# Altium PCB bs.PcbDoc (part 1 of 2)
Units mm, origin at the board's own origin, x right, y up, seen from the top; angles counter-clockwise.
Board outline 26 x 26 mm, 4 copper layers (Top Layer, Int1 (GND), Int2 (PWR), Bottom Layer), stack 0.801 mm thick; 54 components, 41 nets, 239 pads, 117 vias.
Unrouted connection lines stored in the file: 12.
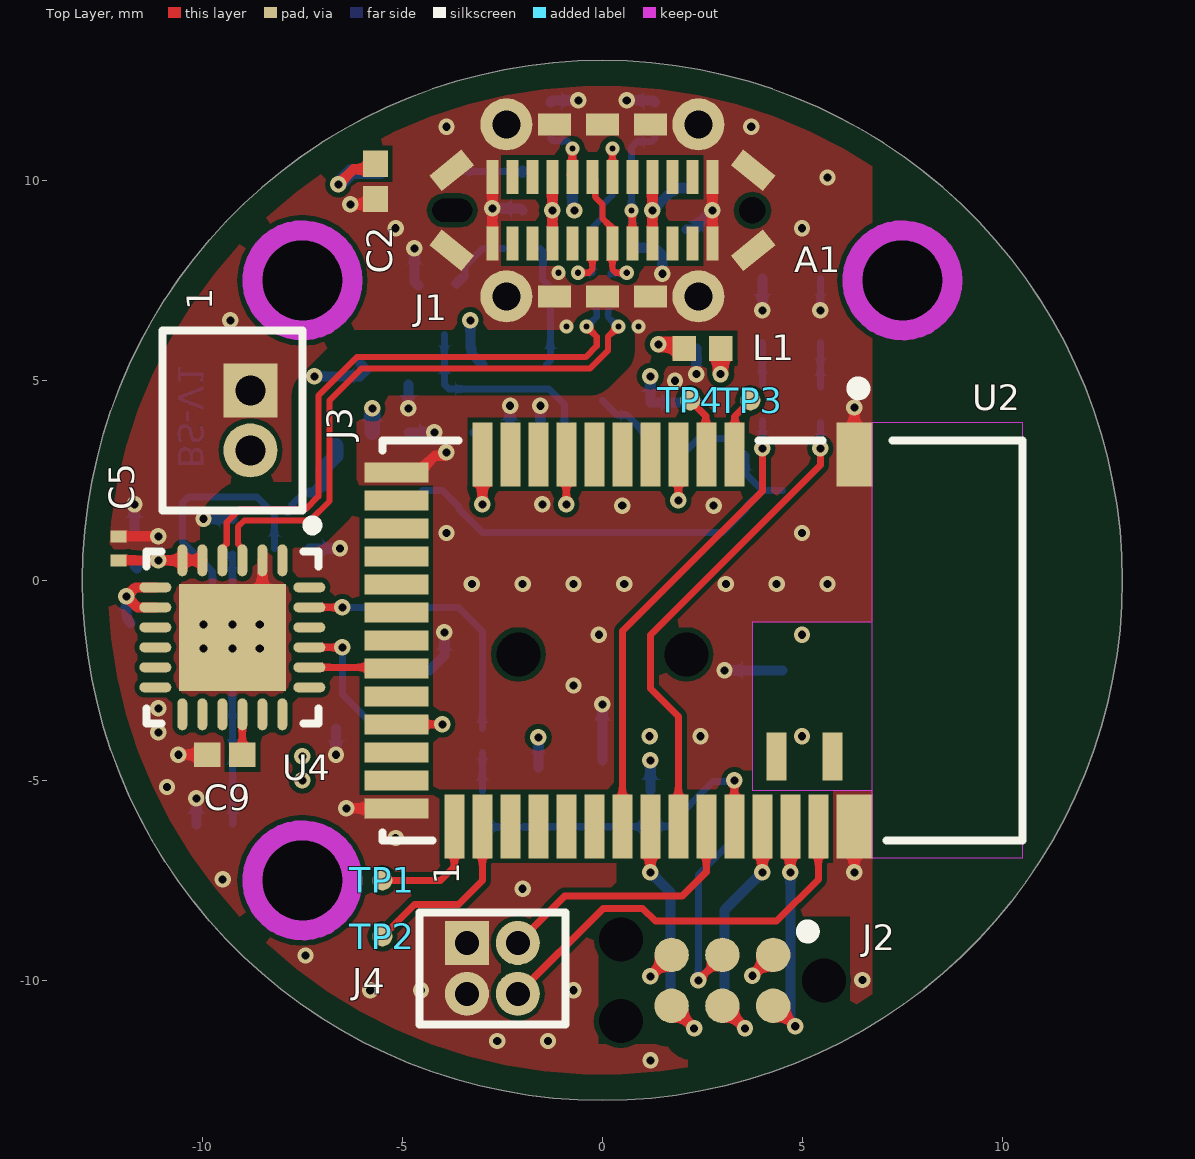
[diagram p0: Top Layer view]
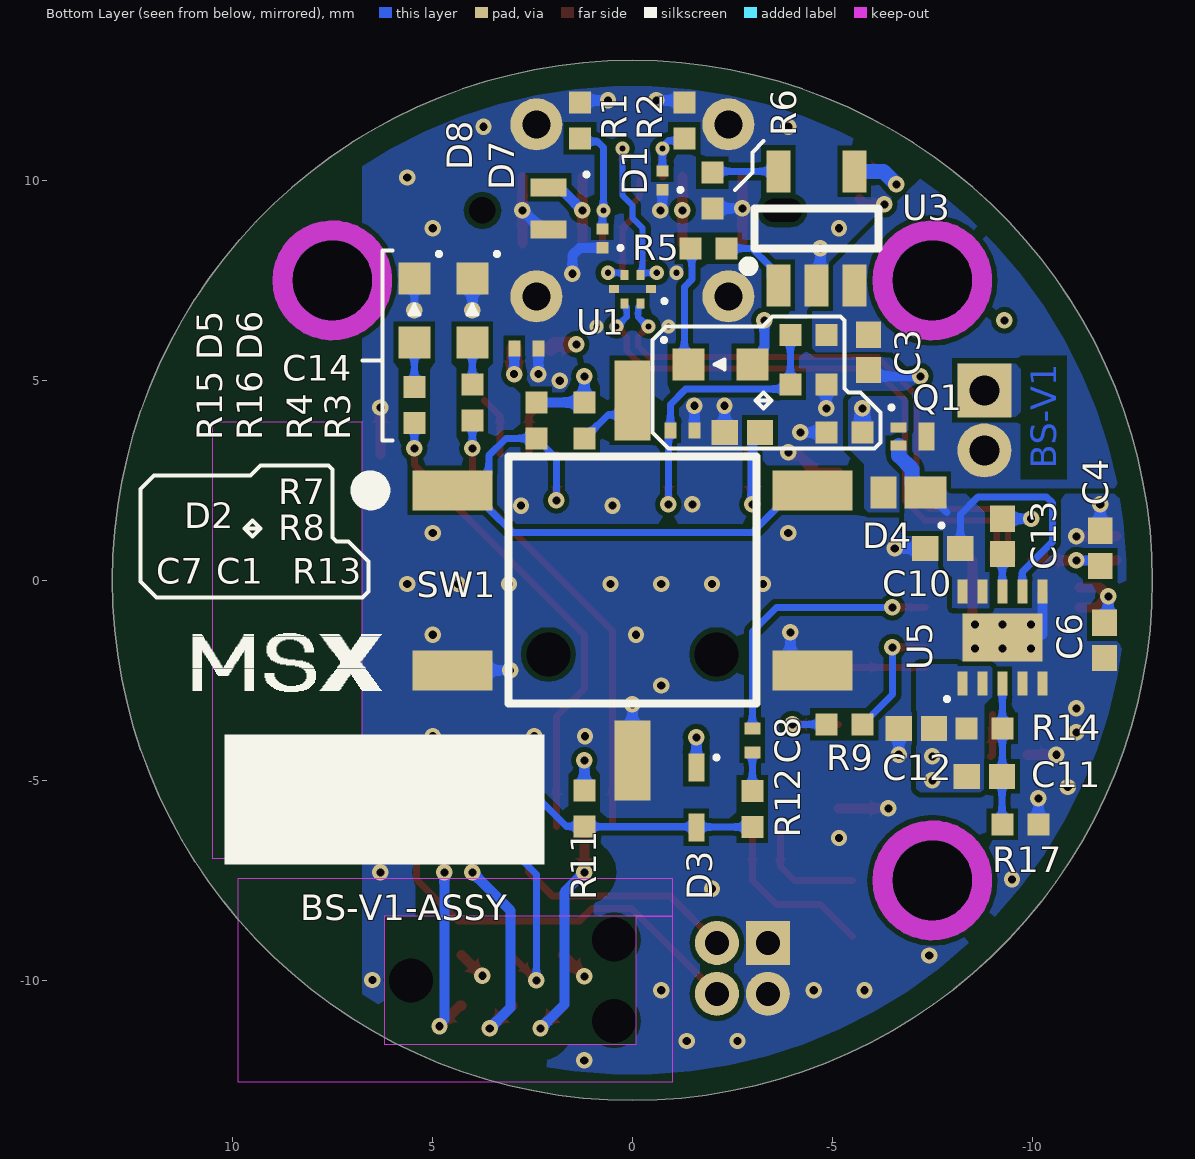
[diagram p1: Bottom Layer view, seen from below]
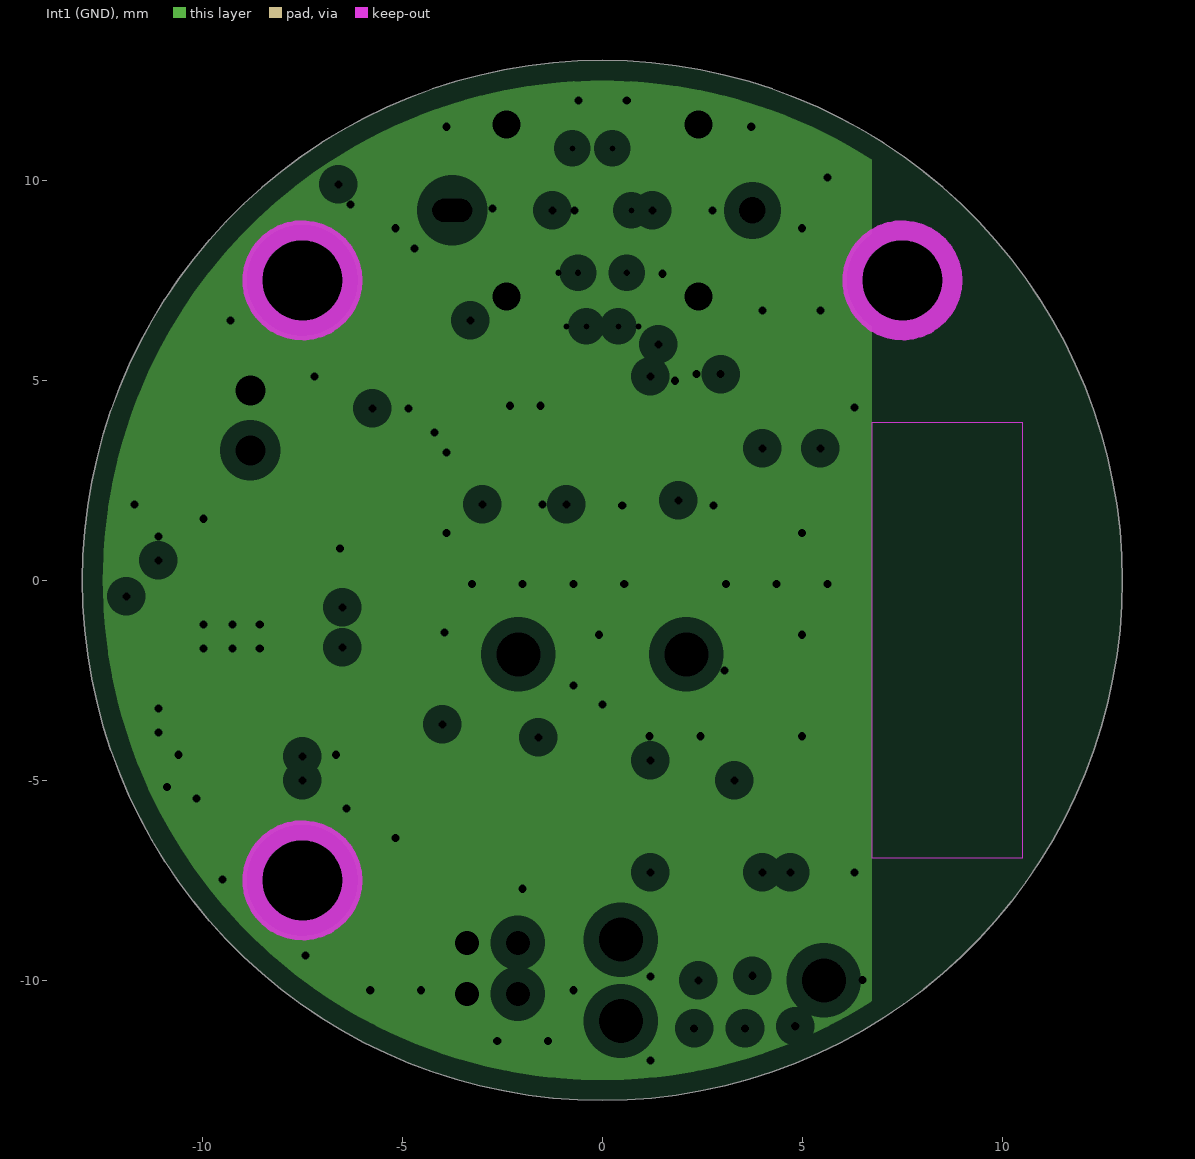
[diagram p2: Int1 (GND), clearances drawn from the general rule]
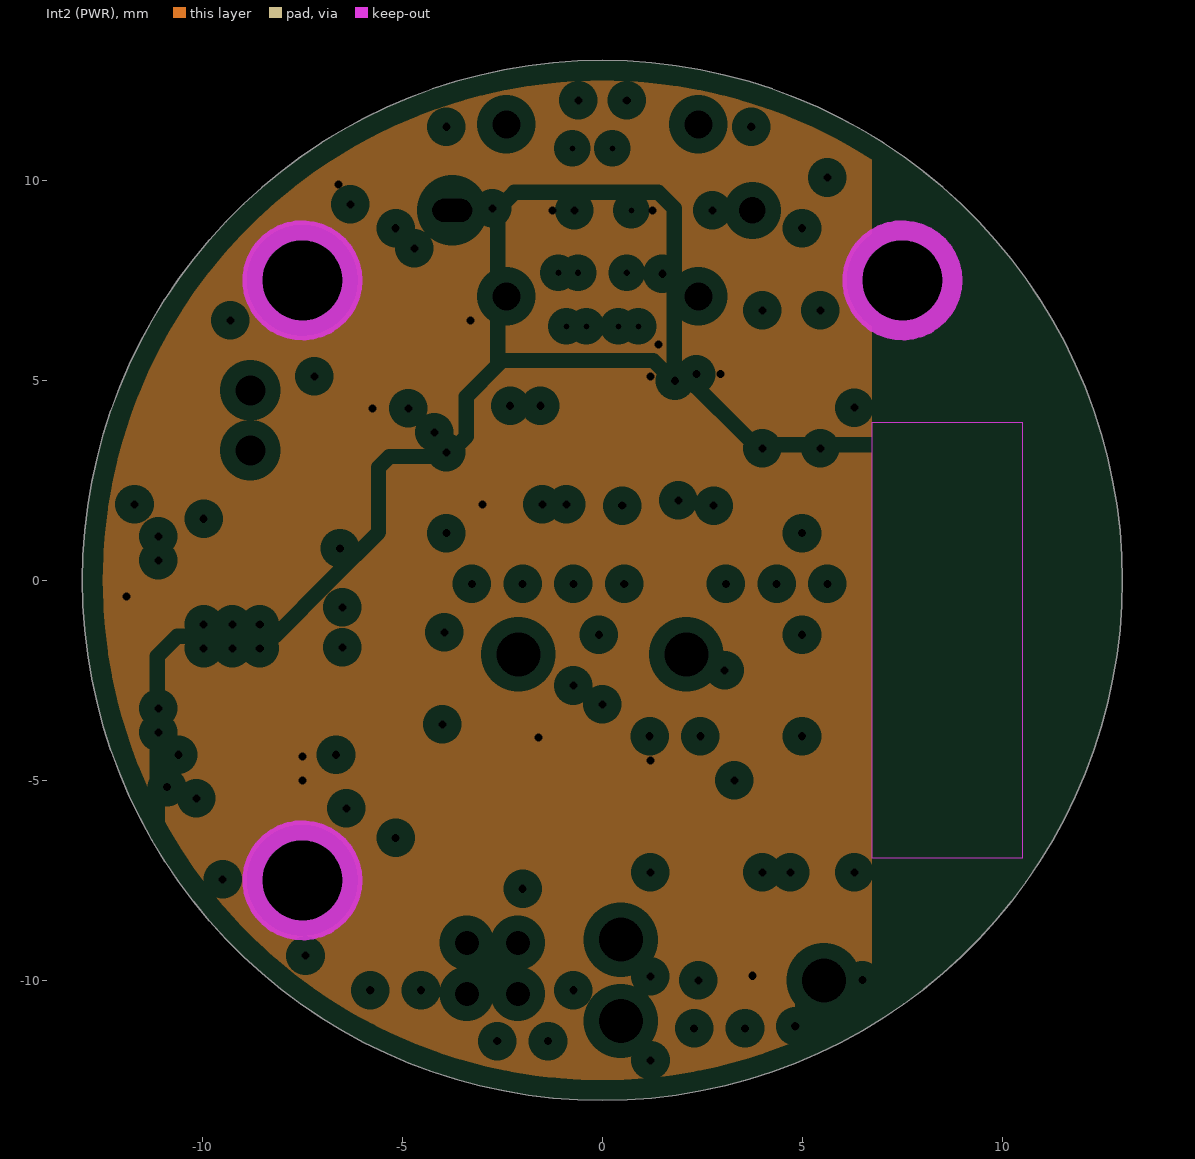
[diagram p3: Int2 (PWR), clearances drawn from the general rule]
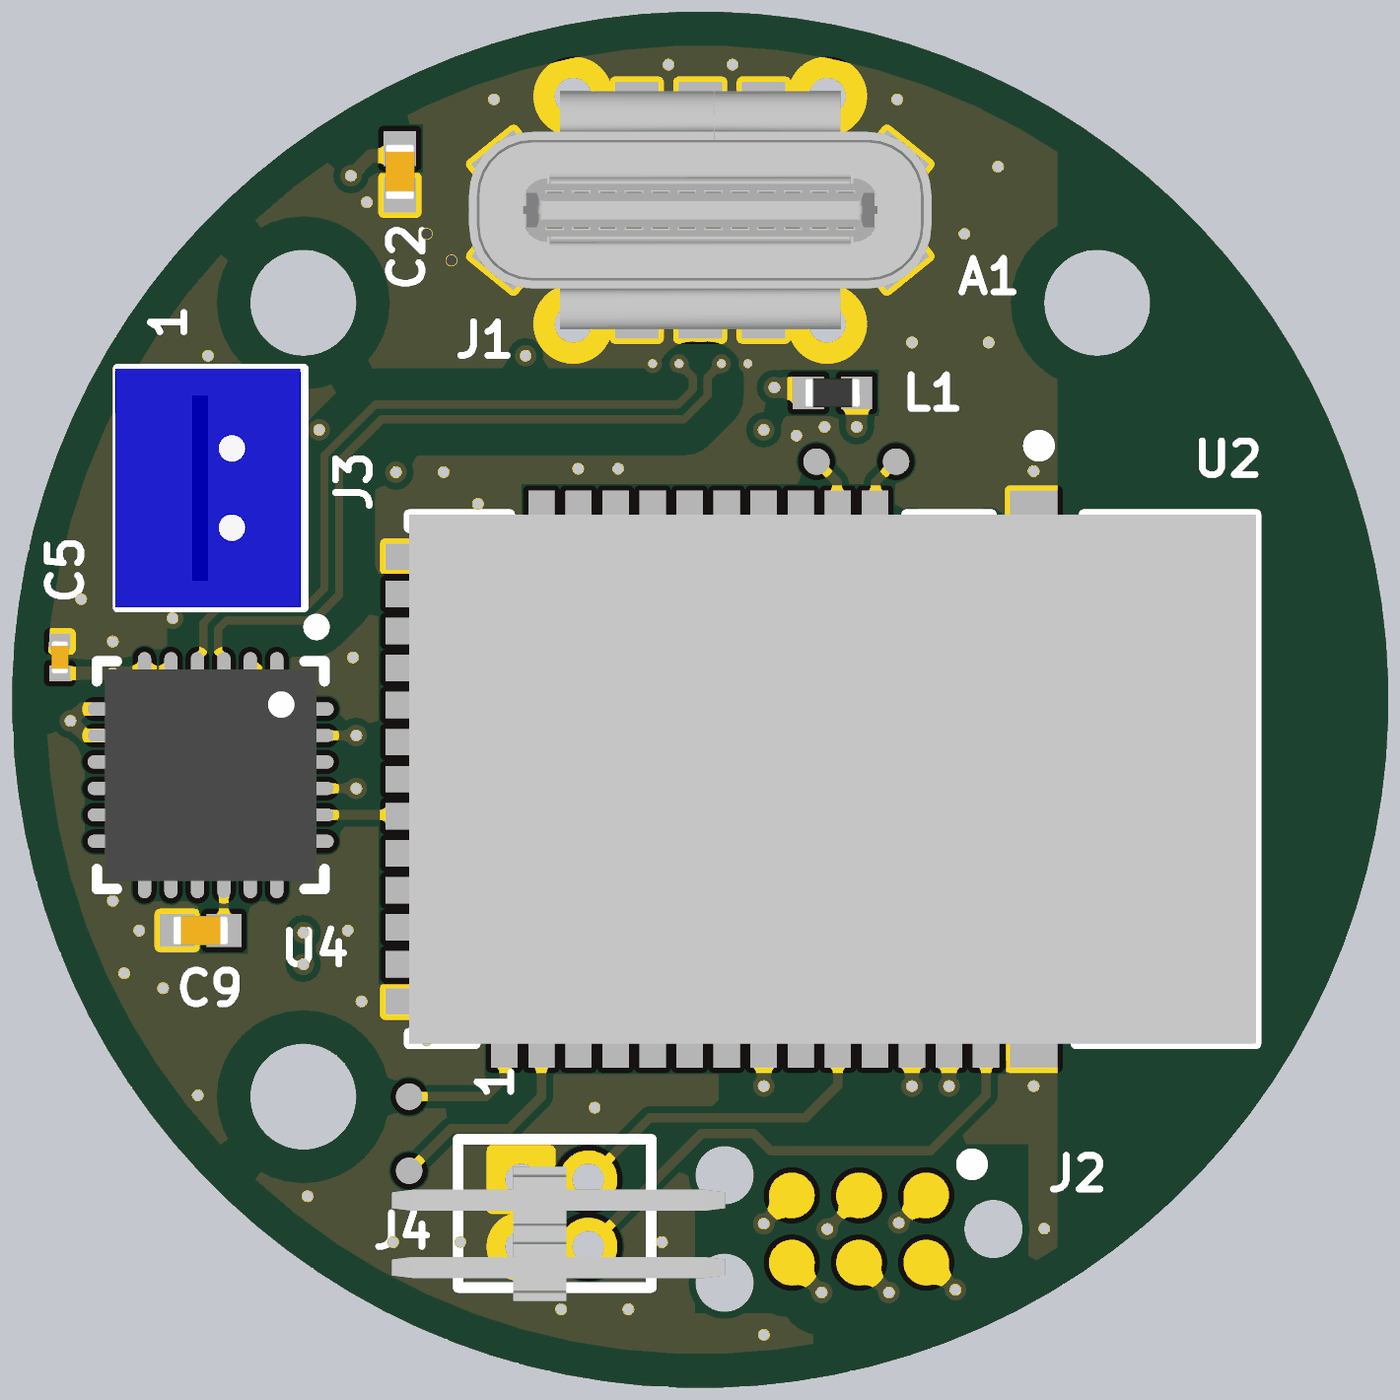
[diagram p4: 3D render of the assembled board from above, using the file's embedded part models]
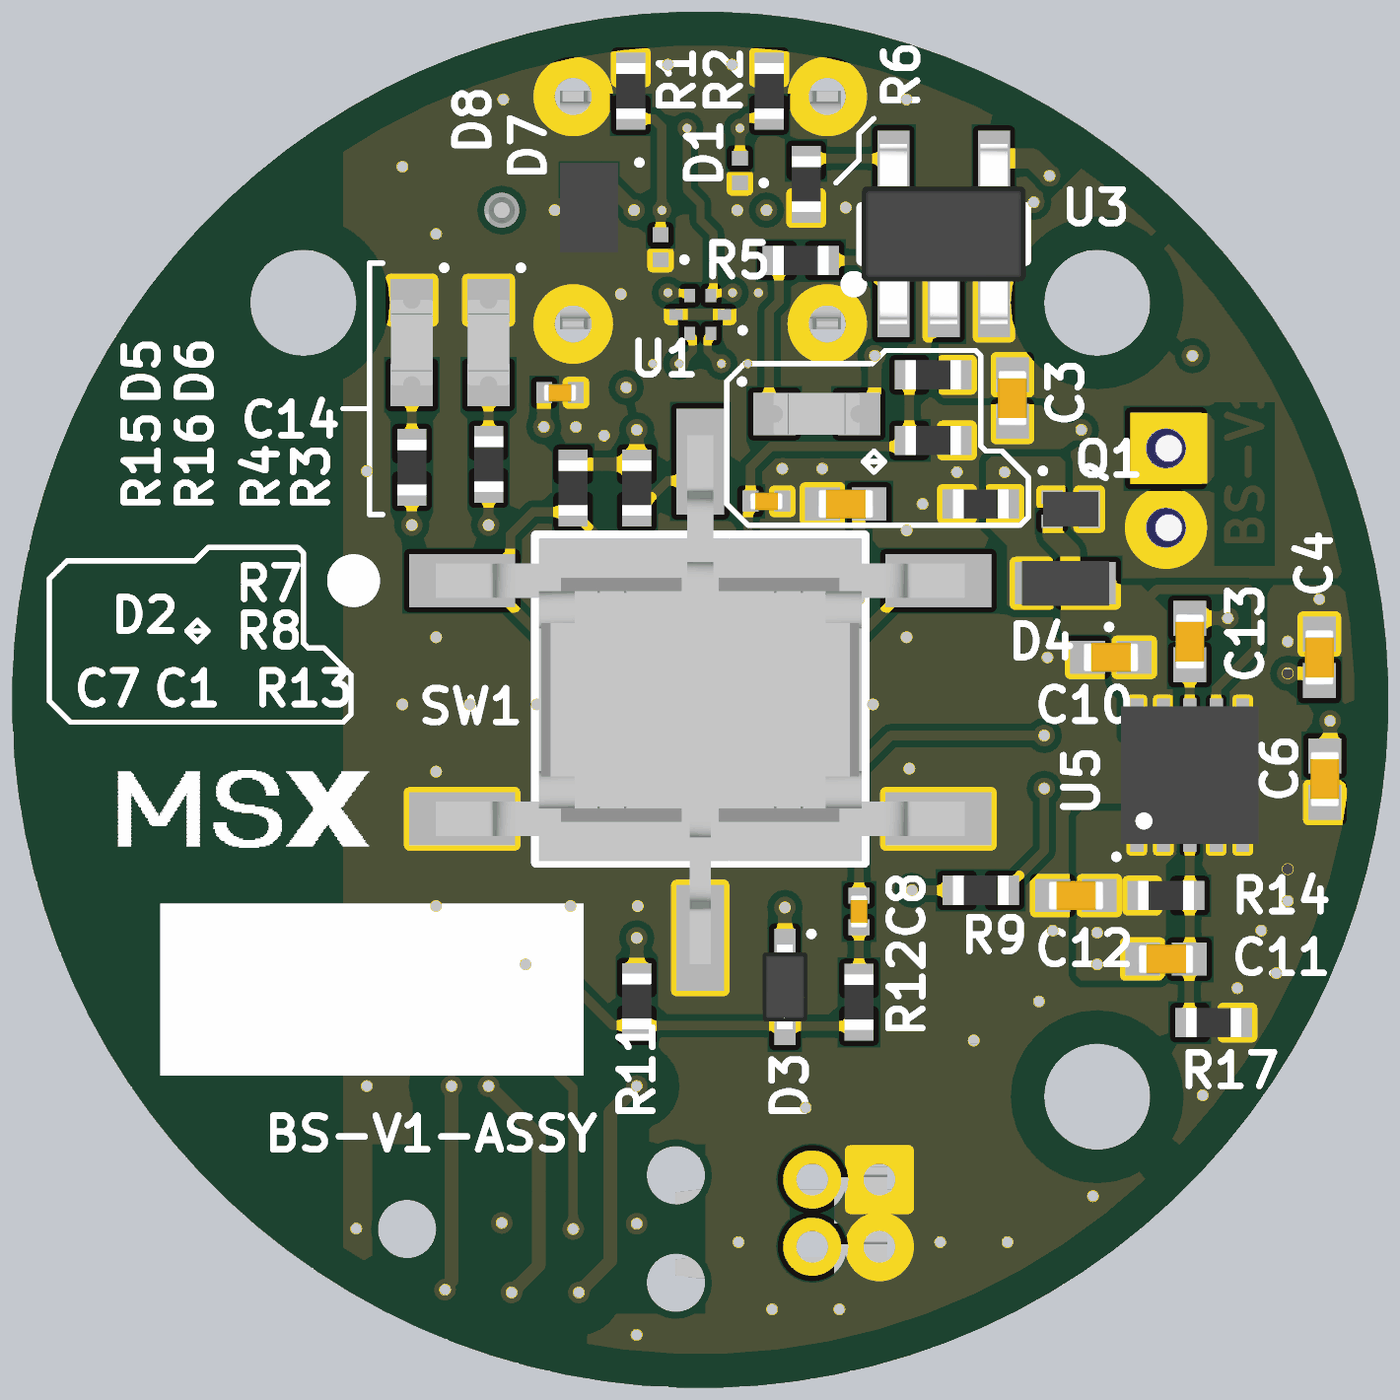
[diagram p5: 3D render of the assembled board from below, using the file's embedded part models]

## Layer stack, top to bottom
Top Solder: solder mask 0.0254, SM-001, Dk 4
Top Layer: signal copper 0.035
Dielectric 1: prepreg 0.1803, PP-021, Dk 4.7
Int1 (GND): plane copper 0.035, net GND
Dielectric 2: core 0.3, CircuitHub-4L, Dk 4.6
Int2 (PWR): plane copper 0.035, net (Multiple Nets)
Dielectric 3: prepreg 0.1803, PP-021, Dk 4.7
Bottom Layer: signal copper 0.035
Bottom Solder: solder mask 0.0254, SM-001, Dk 4

## Board outline
0,-13 cw(c0,0) -13,0 cw(c0,0) 0,13 cw(c0,0) 13,0 cw(c0,0)

## Design rules (kind name [scope] priority, off if disabled: settings)
AcuteAngle [All] p1: minimum=5.00000000000000E+0001 checktracksonly=FALSE
BoardOutlineClearance [Not OnTopSilkscreen And Not OnBottomSilkscreen And Not IsKeepOut] p1: gap=0.635 ignorepadtopadclearanceinfootprint=FALSE
Clearance "GND Via Exception" [InNetClass('USB') vs IsVia And InNet('GND')] p1: gap=0.127 ignorepadtopadclearanceinfootprint=FALSE
Clearance "GND 3H Exception" [InNet('GND') vs InNetClass('USB') And TouchesRoom('USB-TTL','USB-C Top','Prog Pins','Tag-Connect')] p2: gap=0.127 ignorepadtopadclearanceinfootprint=FALSE
Clearance "Sensitive 3H" [InNetClass('SWD') Or InNetClass('USB') vs Not InNetClass('SWD') And Not InNetClass('USB') And Not InNet('DFU') And Not TouchesRoom('USB-C Top','Tag-Connect','Prog Pins','USB-TTL')] p3: gap=0.6 ignorepadtopadclearanceinfootprint=FALSE
Clearance "Default Clearance" [Not InComponent('J2','U2') vs Not IsKeepOut] p4: gap=0.127 ignorepadtopadclearanceinfootprint=FALSE
ComponentClearance "TP to TP" [InComponentClass('Testpoints') vs InComponentClass('Testpoints')] p1: gap=0.635 collisioncheckmode=3 verticalgap=0 showdistances=FALSE
ComponentClearance "PTH to PTH" [InComponentClass('PTH') And Not InComponentClass('Testpoints') And Not InComponent('J2') vs InComponentClass('PTH') And Not InComponentClass('Testpoints') And Not InComponent('J2')] p2: gap=2.54 collisioncheckmode=3 verticalgap=0 showdistances=FALSE
ComponentClearance "SMT to PTH" [InComponentClass('SMT') And Not InComponent('J2') vs InComponentClass('PTH') And Not InComponentClass('Testpoints')] p3: gap=1.016 collisioncheckmode=3 verticalgap=0 showdistances=FALSE
ComponentClearance "SMT to SMT" [InComponentClass('SMT') vs InComponentClass('SMT')] p4: gap=0.635 collisioncheckmode=3 verticalgap=0 showdistances=FALSE
DiffPairsRouting USB [InDifferentialPairClass('USB')] p1: maxlimit=0.127 minlimit=0.127 mostfreqgap=0.127 toplayer_minwidth=0.152 toplayer_maxwidth=0.152 toplayer_prefwidth=0.152 bottomlayer_minwidth=0.152 bottomlayer_maxwidth=0.152 bottomlayer_prefwidth=0.152 impedanceprofiledriven=TRUE impedanceprofileid={9615F083-B4A8-41AA-9258-6BDF7C8BAEB9} impedanceprofilevalue=90.000000 maxuncoupledlength=0.635
Height "Top Height" [OnTopLayer] p1: minheight=0 maxheight=9 prefheight=8.8
Height "Bottom Height" [OnBottomLayer] p2: minheight=0 maxheight=8 prefheight=7.8
HoleSize "Via Hole Size" [IsVia] p1: absolutevalues=TRUE maxlimit=150 minlimit=0.152 maxpercent=80.000 minpercent=20.000
HoleSize "Default Hole Size" [All] p2: absolutevalues=TRUE maxlimit=150 minlimit=0.254 maxpercent=80.000 minpercent=20.000
HoleToHoleClearance mdViaViaSameLayer [IsVia vs IsVia] p1: gap=0.203 allowstackedmicrovias=TRUE
HoleToHoleClearance [All] p2: gap=0.254 allowstackedmicrovias=TRUE
Length "SWD Max Length" [InNetClass('SWD')] p1: maxlimit=101.6 minlimit=0
MatchedLengths "USB Matching" [InDifferentialPairClass('USB')] p1: tolerance=3.81 checknetsindiffpair=TRUE checkdiffpairvsdiffpair=FALSE checkxsignals=FALSE checkothers=FALSE
MaximumViaCount "USB 2 Vias" [InDifferentialPairClass('USB')] p1: limit=2
MinimumAnnularRing "Via AR" [IsVia] p1: minimumring=0.102
MinimumAnnularRing [All] p2: minimumring=0.127
MinimumSolderMaskSliver [All] p1 off: minsoldermaskwidth=0.001
PermittedLayers "All Allowed" [All] p1: toplayerpermitted=TRUE bottomlayerpermitted=TRUE
PlaneClearance [All] p1: clearance=0.381
PlaneConnect "Direct Plane Connect" [IsVia] p1: planeconnectstyle=Direct reliefexpansion=0.508 reliefentries=4 reliefconductorwidth=0.254 reliefairgap=0.254
PlaneConnect [All] p2: planeconnectstyle=Relief reliefexpansion=0.508 reliefentries=4 reliefconductorwidth=0.254 reliefairgap=0.127
PolygonConnect "Direct Poly Connect" [IsVia Or InComponentClass('Testpoints') Or OnTopLayer Or OnBottomLayer] p1: connectstyle=Direct reliefconductorwidth=0.254 reliefentries=4 polygonreliefangle="90 Angle" airgapwidth=0.254
PolygonConnect [All] p2: connectstyle=Relief reliefconductorwidth=0.254 reliefentries=4 polygonreliefangle="90 Angle" airgapwidth=0.127
RoomDefinition Tag-Connect [False] p1: confinementstyle=ConfineIn formatcopy=TRUE lockcomponents=FALSE outline -0.1,-8.4 6.2,-8.4 6.2,-11.6 -0.1,-11.6
RoomDefinition USB-TTL [False] p2: confinementstyle=ConfineIn formatcopy=TRUE lockcomponents=FALSE outline -10.9,0.912 -7.6,0.912 -7.6,-0.1 -10.9,-0.1
RoomDefinition "Prog Pins" [False] p3: confinementstyle=ConfineIn formatcopy=TRUE lockcomponents=FALSE outline 6,-4.3 -0.004,-4.3 -0.004,-7.7 6,-7.7
RoomDefinition "USB-C Top" [False] p4: confinementstyle=ConfineIn formatcopy=TRUE lockcomponents=FALSE outline -3.1,12.353 3.1,12.353 3.1,6.09 -3.1,6.09
RoutingLayers "Default Layers" [All] p1: top layer_v5=TRUE bottom layer_v5=TRUE
RoutingVias [All] p1: holewidth=0.203 width=0.406 viastyle="Through Hole" minholewidth=0.152 minwidth=0.356 maxholewidth=150 maxwidth=150
SMDEntry [All] p1: side=TRUE corner=TRUE anyangle=TRUE
SilkToSilkClearance [All] p1 off: silktosilkclearance=0.254
SilkToSolderMaskClearance [IsPad] p1 off: minsilkscreentomaskgap=0.127 clearancetoexposedcopper=TRUE
SolderMaskExpansion [All] p1: expansion=0.102 istentingtop=FALSE
UnRoutedNet [All] p1: checkbadconnections=TRUE
ViasUnderSMD [All] p1: allowed=FALSE
Width "Power Width" [InNetClass('Power')] p1: maxlimit=150 minlimit=0.178 preferedwidth=0.254
Width "50Ohm SE Width" [InNetClass('SWD')] p2: maxlimit=0.254 minlimit=0.254 preferedwidth=0.254 impedanceprofiledriven=TRUE impedanceprofileid={A2997885-AED6-4369-A679-767B99147C96} impedanceprofilevalue=50.000000 minimp=50.000000 maximp=50.000000 favimp=50.000000
Width "Default Width" [All] p3: maxlimit=150 minlimit=0.127 preferedwidth=0.178
18 further rules are at their usual default settings.

## Classes and differential pairs
component class SMT: C1 C2 C3 C4 C5 C6 C7 C8 C9 C10 C11 C12 C13 C14 D1 D2 D3 D4 D5 D6 D7 D8 J2 L1 Q1 R1 R2 R3 R4 R5 R6 R7 R8 R9 R11 R12 R13 R14 R15 R16 R17 SW1 U1 U2 U3 U4 U5
component class PTH: J1 J3 J4
component class "Sensitive Exception": J1 J2 U1 U2 U4
component class Testpoints: TP1 TP2 TP3 TP4
net class Power: 3V3 GND VBAT VBUS VBUS_IN VIN_LDO
differential pair class USB: USB USB_IN
net class USB: USB_IN_N USB_IN_P USB_N USB_P
net class SWD: SWCLK SWDIO SWO
differential pair USB: +USB_P -USB_N
differential pair USB_IN: +USB_IN_P -USB_IN_N

## Components (designator, comment, footprint, x,y, rotation, side; value= is the part's Value field where it differs from the comment)
C1 "10uF" C0402 -2.75,3.7 r180 bottom locked
C2 "4.7uF" C0402 -5.675,9.975 r90 top locked
C3 "4.7uF" C0402 -5.9,5.7 r90 bottom locked
C4 "1uF" C0402 -11.698,0.8 r270 bottom locked
C5 "0.1uF" C0201 -12.1,0.801 r270 top locked
C6 "1uF" C0402 -11.8,-1.5 r90 bottom locked
C7 "0.1uF" C0201 -1.25,3.75 r0 bottom locked
C8 "0.1uF" C0201 -3,-4 r90 bottom locked
C9 "4.7uF" C0402 -9.44,-4.36 r0 top locked
C10 "10uF" C0402 -7.76,0.8 r180 bottom locked
C11 "10000pF" C0402 -8.8,-4.9 r0 bottom locked
C12 "10uF" C0402 -7.1,-3.7 r180 bottom locked
C13 "0.015uF" C0402 -9.25,1.1 r270 bottom
C14 "0.1uF" C0201 2.65,5.8 r0 bottom locked
D1 "ESDAXLC6-1BU2" ONS_0201 -0.75,10 r0 bottom locked
D2 "5988070107F" LED0603 -2.2,5.4 r180 bottom locked
D3 "1N4148X-TP" MCC_SOD523 -1.6,-5.425 r270 bottom locked
D4 "PMEG2020EPK" NXP_DFN1608D-2 -6.9,2.2 r0 bottom locked
D5 "5988091107F" LED0603 5.45,6.75 r270 bottom locked
D6 "5988070107F" LED0603 4,6.75 r270 bottom locked
D7 "ESDAXLC6-1BU2" ONS_0201 0.75,8.55 r0 bottom locked
D8 "ESDA7P60-1U1M" STM_1610 2.1,9.3 r270 bottom locked
J1 "10132328-10011LF" AMP_USBC_VT 0,9.25 r180 top locked
J2 "TC2030-IDC-NL" TAG_6P 3,-10 r180 top locked
J3 "B2B-ZR(LF)(SN)" JST_ZH_2P_PTH_VT -8.8,4 r270 top locked
J4 "GRPB022VWVN-RC" HDR10_2X2_0.05IN -2.75,-9.7 r270 top locked
L1 "BLM15PX601SN1D" L0402 2.5,5.8 r0 top locked
Q1 "DMP21D0UFB4-7B" DIO_X2-DFN1006-3 -7,3.6 r180 bottom locked
R1 "5.1k" R0402 1.31,11.5 r270 bottom locked
R2 "5.1k" R0402 -1.3,11.5 r270 bottom locked
R3 "47R" R0402 1.2,4 r90 bottom locked
R4 "10k" R0402 2.4,4 r90 bottom locked
R5 "1k" R0402 -1.9,8.3 r180 bottom locked
R6 "2k" R0402 -2,9.741 r90 bottom locked
R7 "806k" R0402 -4.4,6.14 r180 bottom locked
R8 "2M" R0402 -4.4,4.9 r0 bottom locked
R9 "1k" R0402 -5.3,-3.6 r180 bottom locked
R11 "10k" R0402 1.2,-5.7 r90 bottom locked
R12 "0R" R0402 -3,-5.715 r270 bottom locked
R13 "100k" R0402 -5.3,3.7 r180 bottom locked
R14 "3.57k" R0402 -8.8,-3.7 r0 bottom locked
R15 "47R" R0402 5.45,4.39 r270 bottom locked
R16 "1k" R0402 4,4.45 r270 bottom locked
R17 "1.15k" R0402 -9.7,-6.1 r0 bottom locked
SW1 "FSMIJM61AB04" TE_FSMIJM61AB04 0,0 r180 bottom locked
TP1 "TP SMT 0.5MM" TP_SMT_0.5MM -5.5,-7.5 r180 top locked
TP2 "TP SMT 0.5MM" TP_SMT_0.5MM -5.5,-8.9 r180 top locked
TP3 "TP SMT 0.5MM" TP_SMT_0.5MM 3.7,4.5 r90 top locked
TP4 "TP SMT 0.5MM" TP_SMT_0.5MM 2.197,4.5 r90 top locked
U1 "EXC-14CS350H" PAN_EXC14CS 0,7.28 r0 bottom locked
U2 "MDBT42Q" RAY_MDBT42Q 2.5,-1.5 r270 top locked
U3 "MCP73831T-2ATI/OT" MCP_SOT23-5 -4.6,8.8 r90 bottom locked
U4 "CP2104-F03-GMR" SIL_QFN-24 -9.25,-1.425 r270 top locked
U5 "TPS7A9001DSKR" TI_DSK -9.25,-1.425 r90 bottom locked

## Footprints (in the part's own frame and the unit in brackets; to place one, negate y for a bottom-side part, rotate by r counter-clockwise, add the part's x,y. Pads: shape width x height; smd on the part's side, far side on the other; paste and mask are expansions set on the pad)
AMP_USBC_VT [mm] "USB-C Connector, Through Hole  Vertical"
  round 0 hole 0.66 unplated: 0(-3.75,0)
  round 0 hole 0.58 slot 1 at 0 deg unplated: 0(3.75,0)
  rect 0.3x0.85 smd: A1(-2.75,0.83) A2(-2.25,0.83) A3(-1.75,0.83) A4(-1.25,0.83) A5(-0.75,0.83) A6(-0.25,0.83) A7(0.25,0.83) A8(0.75,0.83) A9(1.25,0.83) A10(1.75,0.83) A11(2.25,0.83) A12(2.75,0.83) B1(2.75,-0.83) B2(2.25,-0.83) B3(1.75,-0.83) B4(1.25,-0.83) B5(0.75,-0.83) B6(0.25,-0.83) B7(-0.25,-0.83) B8(-0.75,-0.83) B9(-1.25,-0.83) B10(-1.75,-0.83) B11(-2.25,-0.83) B12(-2.75,-0.83)
  rect 1.03x0.5 smd rot 39: SHA1(-3.77,1) SHB1(3.77,-1)
  round 1.3 hole 0.7: SHA2(-2.4,2.15) SHA6(2.4,2.15) SHB2(2.4,-2.15) SHB6(-2.4,-2.15)
  rect 0.82x0.55 smd: SHA3(-1.2,2.15) SHA4(0,2.15) SHA5(1.2,2.15) SHB3(1.2,-2.15) SHB4(0,-2.15) SHB5(-1.2,-2.15)
  rect 1.03x0.5 smd rot 141: SHA7(3.77,1) SHB7(-3.77,-1)
  body extent -4.37,-2.25 4.37,2.25, height 8.8
C0201 [mm] "Chip Capacitor, 2-Leads, Body 0.60x0.30mm, IPC Medium Density"
  rect 0.3x0.4 smd: 1(-0.3,0) 2(0.3,0)
  body extent -0.32,-0.17 0.32,0.17, height 0.33
C0402 [mm] "Chip Capacitor, 2-Leads, Body 1.00x0.50mm, IPC Medium Density"
  rect 0.66x0.62 smd: 1(-0.44,0) 2(0.44,0)
  body extent -0.53,-0.28 0.53,0.28, height 0.55
DIO_X2-DFN1006-3 [mm] "DFN, 3-Leads, Body 0.60x1.00mm, Pitch 0.65mm, IPC Medium Density"
  rect 0.4x0.25 smd: 1(-0.35,0.225) 2(-0.35,-0.225)
  rect 0.4x0.7 smd: 3(0.35,0)
  silkscreen extent -0.58,0.68 -0.48,0.77, body extent -0.53,-0.33 0.53,0.32, height 0.4
HDR10_2X2_0.05IN [mm] "4-Pin 2x2 0.05in PTH Header"
  rect 1.1x1.1 hole 0.6: 1(-0.635,-0.635)
  round 1.1 hole 0.6: 2(-0.635,0.635) 3(0.635,-0.635) 4(0.635,0.635)
  silkscreen extent -1.4,-1.83 1.41,1.83, body extent -1.27,-1.7 1.27,1.7, height 4.05
JST_ZH_2P_PTH_VT [mm] "JST ZH Series 1.5mm 2 Position Through Hole, Vertical"
  rect 1.35x1.35 hole 0.75: 1(-0.75,0)
  round 1.35 hole 0.75: 2(0.75,0)
  silkscreen extent -2.25,-2.2 2.25,1.3, body extent -3.75,-2.25 2.25,1.25, height 4.5
L0402 [mm] "Chip Inductor, 2-Leads, Body 1.00x0.50mm, IPC Medium Density"
  rect 0.59x0.62 smd: 1(-0.455,0) 2(0.455,0)
  body extent -0.53,-0.28 0.53,0.28, height 0.55
LED0603 [mm] "Chip Diode, 2-Leads, Body 1.60x0.80mm, IPC Medium Density"
  rect 0.8x0.8 smd: 1(-0.8,0) 2(0.8,0)
  silkscreen extent -1.46,-0.13 0.1,0.66, body extent -0.81,-0.39 0.81,0.39, height 0.71
MCC_SOD523 [mm] "SODFL, 2-Leads, Body 0.80x1.60mm, IPC Medium Density"
  rect 0.7x0.4 smd: 1(-0.75,0) 2(0.75,0)
  silkscreen extent -1.05,0.45 -0.95,0.55, body extent -0.8,-0.43 0.8,0.43, height 0.77
MCP_SOT23-5 [mm] "SOT23, 5-Leads, Body 2.90x2.70mm, Pitch 0.95mm, IPC Medium Density"
  rect 1.05x0.6 smd: 1(-1.425,0.95) 2(-1.425,0) 3(-1.425,-0.95) 4(1.425,-0.95) 5(1.425,0.95)
  silkscreen extent -1.07,-1.55 0.5,1.83, body extent -1.7,-1.55 1.7,1.55, height 1.45
NXP_DFN1608D-2 [mm] "DFN, 2-Leads, Body 0.80x1.60mm, Custom Pitch, IPC Medium Density"
  rect 1.05x0.8 smd: 1(-0.425,0)
  rect 0.65x0.8 smd: 2(0.625,0)
  silkscreen extent -0.87,0.78 -0.77,0.87, body extent -0.82,-0.43 0.82,0.43, height 0.4
ONS_0201 [mm] "DSN, 2-Leads, Body 0.6x0.3mm, Pitch 0.47mm"
  rect 0.3x0.28 smd: 1(0,0.235) 2(0,-0.235)
  silkscreen extent -0.5,0.19 -0.4,0.28, body extent -0.15,-0.3 0.15,0.3, height 0.3
PAN_EXC14CS [mm] "2 Line CMC 35 Ohms @ 100MHz 100mA DCR 2 Ohm"
  rect 0.25x0.2 smd: 1(-0.46,0) 4(0.46,0)
  rect 0.2x0.25 smd: 2(-0.2,-0.36) 3(0.2,-0.36) 5(0.2,0.36) 6(-0.2,0.36)
  silkscreen extent -0.85,0.25 -0.75,0.35, body extent -0.44,-0.34 0.44,0.34, height 0.5
R0402 [mm] "Chip Resistor, 2-Leads, Body 1.00x0.50mm, IPC Medium Density"
  rect 0.55x0.55 smd: 1(-0.45,0) 2(0.45,0)
  body extent -0.53,-0.28 0.53,0.28, height 0.4
RAY_MDBT42Q [mm] "BLE Module"
  rect 1.6x0.9 smd: 1(-4.65,3.8) 39(4.65,3.8)
  rect 1.6x0.5 smd: 2(-4.65,0.8) 3(-4.65,0.1) 4(-4.65,-0.6) 5(-4.65,-1.3) 6(-4.65,-2) 7(-4.65,-2.7) 8(-4.65,-3.4) 9(-4.65,-4.1) 10(-4.65,-4.8) 11(-4.65,-5.5) 25(4.65,-6.2) 26(4.65,-5.5) 27(4.65,-4.8) 28(4.65,-4.1) 29(4.65,-3.4) 30(4.65,-2.7) 31(4.65,-2) 32(4.65,-1.3) 33(4.65,-0.6) 34(4.65,0.1) 35(4.65,0.8) 36(4.65,1.5) 37(4.65,2.2) 38(4.65,2.9)
  rect 0.5x1.6 smd: 12(-4.2,-7.65) 13(-3.5,-7.65) 14(-2.8,-7.65) 15(-2.1,-7.65) 16(-1.4,-7.65) 17(-0.7,-7.65) 18(0,-7.65) 19(0.7,-7.65) 20(1.4,-7.65) 21(2.1,-7.65) 22(2.8,-7.65) 23(3.5,-7.65) 24(4.2,-7.65)
  rect 1.2x0.5 smd: 40(2.9,3.25) 41(2.9,1.85)
  Top Layer keep-out region: -0.45,1.25 3.75,1.25 3.75,4.25 -0.45,4.25
  Top Layer keep-out region: -0.381,1.27
  Keep-Out Layer region: -5.45,8 5.45,8 5.45,4.25 -5.45,4.25
  silkscreen extent -6.45,-8 5,8, body extent -5,-8 5,8, height 2.2
SIL_QFN-24 [mm] "QFN, 24-Leads, Body 4.00x4.00mm, Pitch 0.50mm, Thermal Pad 2.68x2.68mm, IPC Medium Density"
  oval 0.8x0.25 smd: 1(-1.925,1.25) 2(-1.925,0.75) 3(-1.925,0.25) 4(-1.925,-0.25) 5(-1.925,-0.75) 6(-1.925,-1.25) 13(1.925,-1.25) 14(1.925,-0.75) 15(1.925,-0.25) 16(1.925,0.25) 17(1.925,0.75) 18(1.925,1.25)
  oval 0.25x0.8 smd: 7(-1.25,-1.925) 8(-0.75,-1.925) 9(-0.25,-1.925) 10(0.25,-1.925) 11(0.75,-1.925) 12(1.25,-1.925) 19(1.25,1.925) 20(0.75,1.925) 21(0.25,1.925) 22(-0.25,1.925) 23(-0.75,1.925) 24(-1.25,1.925)
  rect 2.68x2.68 smd: 25(0,0)
  silkscreen extent -2.92,-2.15 2.15,2.15, body extent -2,-2 2,2, height 0.8
STM_1610 [mm] "DFN, 2-Leads, Body 1.00x1.60mm, Pitch 1.05mm, IPC Medium Density"
  rect 0.45x0.9 smd: 1(-0.525,0) 2(0.525,0)
  silkscreen extent -0.9,0.9 -0.8,1, body extent -0.85,-0.55 0.85,0.55, height 0.6
TAG_6P [mm] "Tag Connect 6-Pin Connector"
  round 0 hole 1.1 unplated: 0(-2.54,0) 0(2.54,-1.016) 0(2.54,1.016)
  round 0.863 smd paste-99: 1(-1.27,-0.635) 2(-1.27,0.635) 3(0,-0.635) 4(0,0.635) 5(1.27,-0.635) 6(1.27,0.635)
  Bottom Layer keep-out region: -6.85,-2.55 4,-2.55 4,-1.6 -3.2,-1.6 -3.2,1.6 3.1,1.6 3.1,-1.6 4,-1.6 4,2.55 -6.85,2.55
  silkscreen extent -2.28,-1.37 -1.99,-1.07
TE_FSMIJM61AB04 [mm] "Push Button Tactile Switch, 6mm x 6mm, Illuminated Blue, SPST-NO, SMT"
  round 0 hole 1.1 unplated: 0(-2.1,-1.85) 0(2.1,-1.85)
  rect 2x1 smd: 1(-4.5,2.25) 2(4.5,2.25) 3(-4.5,-2.25) 4(4.5,-2.25)
  rect 0.9x2 smd: 5(0,-4.5) 6(0,4.5)
  silkscreen extent -6.8,-3.07 3.1,3.1, body extent -5,-5 5,5, height 7.8
TI_DSK [mm] "PSON, 10-Leads, Body 2.50x2.50mm, Pitch 0.50mm, Thermal Pad 2.00x1.16mm, IPC Medium Density"
  rect 0.6x0.25 smd mask+0.07: 1(-1.15,1) 2(-1.15,0.5) 3(-1.15,0) 4(-1.15,-0.5) 5(-1.15,-1) 6(1.15,-1) 7(1.15,-0.5) 8(1.15,0) 9(1.15,0.5) 10(1.15,1)
  rect 1.2x2 smd mask+0.07: 11(0,0)
  silkscreen extent -1.59,1.34 -1.49,1.44, body extent -1.3,-1.3 1.3,1.3, height 0.8
TP_SMT_0.5MM [mm] "0.5mm SMT Testpoint"
  round 0.5 smd: 1(0,0)

## Part data
C1 C10 C12: library part "10uF 10V 0402", "CAP CER 10UF 10V X5R 0402", Case/Package=0402, Case Code (Metric)=1005, Dielectric=X5R, Manufacturer=Samsung, Manufacturer Part Number=CL05A106MP5NUNC, Max Operating Temperature=85°C, Min Operating Temperature=-55°C, Package Quantity=1, Supplier Part Number 1=1276-1450-1-ND, Tolerance=20%, Voltage Rating=10V, Capacitance=10uF, Case Code (Imperial)=0402, ClassName=SMT, ComponentLink1Description=https://datasheet.ciiva.com/25721/cl05a106mp5nunc-25721584.pdf, ComponentLink1URL=https://datasheet.ciiva.com/25721/cl05a106mp5nunc-25721584.pdf, ComponentLink2Description=https://datasheet.ciiva.com/26838/getdatasheetpartid-745310-26838170.pdf, ComponentLink2URL=https://datasheet.ciiva.com/26838/getdatasheetpartid-745310-26838170.pdf, Contact Plating=Nickel,Tin, Depth=0.5mm, Lead Free="Lead Free", Length=1mm, Mount="Surface Mount", Packaging="Tape and Reel", Pricing 1="1=0.4, 10=0.277, 100=0.1663, 500=0.1247, 1000=0.1053, 2500=0.0998, 5000=0.0943 (USD)", Radiation Hardening=No, Stock 1=2282441, Supplier 1=Digi-Key, Termination=Wraparound, Thickness=0.028inch, Width=0.02inch
C2 C3 C9: library part "4.7uF 16V 0402", "CAP CER 4.7UF 16V X5R 0402", Case/Package=0402, Case Code (Metric)=1005, Dielectric=X5R, Manufacturer=Samsung, Manufacturer Part Number=CL05A475MO5NUNC, Max Operating Temperature=85°C, Min Operating Temperature=-55°C, Supplier Part Number 1=1276-6836-1-ND, Tolerance=20%, Voltage Rating=16V, Capacitance=4.7uF, Case Code (Imperial)=0402, ClassName=SMT, Length=0.039inch, Packaging="Tape and Reel", Pricing 1="1=0.36, 10=0.248, 100=0.1485, 500=0.1114, 1000=0.0941, 2500=0.0891, 5000=0.0842 (USD)", Stock 1=282710, Supplier 1=Digi-Key, Thickness=0.022inch, Width=0.02inch
C4 C6: library part "1uF 25V 0402", "CAP CER 1UF 25V X5R 0402", Case/Package=0402, Case Code (Metric)=1005, Dielectric=X5R, Manufacturer="Taiyo Yuden", Manufacturer Part Number=TMK105BJ105MV-F, Max Operating Temperature=85°C, Min Operating Temperature=-55°C, Package Quantity=1, Supplier Part Number 1=587-3245-1-ND, Tolerance=20%, Voltage Rating=25V, Capacitance=1uF, Case Code (Imperial)=0402, ClassName=SMT, ComponentLink1Description=https://datasheet.ciiva.com/11596/tmk105bj105mv-f-ss-11596466.pdf, ComponentLink1URL=https://datasheet.ciiva.com/11596/tmk105bj105mv-f-ss-11596466.pdf, ComponentLink2Description=https://datasheet.ciiva.com/15922/tmk105bj105mv-f-pdf-15922317.pdf, ComponentLink2URL=https://datasheet.ciiva.com/15922/tmk105bj105mv-f-pdf-15922317.pdf, ComponentLink3Description=https://datasheet.ciiva.com/13404/mlcc-all-e-541559-13404206.pdf, ComponentLink3URL=https://datasheet.ciiva.com/13404/mlcc-all-e-541559-13404206.pdf, ComponentLink4Description=https://datasheet.ciiva.com/30154/128tmk105bj105mv-f-30154639.pdf, ComponentLink4URL=https://datasheet.ciiva.com/30154/128tmk105bj105mv-f-30154639.pdf, Composition=Ceramic, Depth=0.5mm, Halogen Free="Halogen Free", Height=0.5mm, Length=1mm, Mount="Surface Mount", Packaging="Tape and Reel", Pricing 1="1=0.2, 10=0.14, 100=0.066, 500=0.0463, 1000=0.0383, 2500=0.0357, 5000=0.0326 (USD)", Radiation Hardening=No, Stock 1=113342, Supplier 1=Digi-Key, Termination=SMD/SMT, Thickness=0.022inch, Voltage Rating (DC)=25V, Width=0.02inch
C5 C7 C8 C14: library part "0.1uF 16V 0201", "CAP CER 0.1UF 16V X5R 0201", Capacitance=1E-07f, Case/Package=0201, Case Code (Metric)=0603, Dielectric=X5R, Manufacturer=Murata, Manufacturer Part Number=GRM033R61C104ME84D, Max Operating Temperature=85°C, Min Operating Temperature=-55°C, Package Quantity=15000, Supplier Part Number 1=490-9986-1-ND, Tolerance=20%, Voltage Rating=16V, Case Code (Imperial)=0201, ClassName=SMT, ComponentLink1Description=http://www.mouser.com/ds/2/281/c02e-2905.pdf, ComponentLink1URL=http://www.mouser.com/ds/2/281/c02e-2905.pdf, Height=0.3mm, Length=0.024inch, Packaging="Tape and Reel", Pricing 1="1=0.1, 10=0.029, 100=0.013, 500=0.0093, 1000=0.0073, 2500=0.0067, 5000=0.0061 (USD)", Stock 1=660567, Supplier 1=Digi-Key, Termination=SMD/SMT, Thickness=0.013inch, Voltage Rating (DC)=16V, Weight=1.2E-05oz, Width=0.3mm
C11: library part "10000pF 25V 0402", "CAP CER 10000PF 25V X7R 0402", Capacitance=10nF, Case/Package=0402, Case Code (Metric)=1005, Dielectric=X7R, Dielectric Material=Ceramic, Insulation Resistance=10GR, Manufacturer=Murata, Manufacturer Part Number=GRM155R71E103KA01D, Max Operating Temperature=125°C, Min Operating Temperature=-55°C, Package Quantity=1, Supplier Part Number 1=490-1312-1-ND, Tolerance=10%, Voltage=25V, Case Code (Imperial)=0402, ClassName=SMT, ComponentLink1Description=https://datasheet.ciiva.com/11786/0900766b807a1cab-11786320.pdf, ComponentLink1URL=https://datasheet.ciiva.com/11786/0900766b807a1cab-11786320.pdf, ComponentLink2Description=https://datasheet.ciiva.com/18184/getdatasheetpartid-161489-18184689.pdf, ComponentLink2URL=https://datasheet.ciiva.com/18184/getdatasheetpartid-161489-18184689.pdf, ComponentLink3Description=https://datasheet.ciiva.com/28534/1699889-28534148.pdf, ComponentLink3URL=https://datasheet.ciiva.com/28534/1699889-28534148.pdf, ComponentLink4Description=https://datasheet.ciiva.com/7937/1747448-7937621.pdf, ComponentLink4URL=https://datasheet.ciiva.com/7937/1747448-7937621.pdf, ComponentLink5Description=https://datasheet.ciiva.com/16199/product-16199034.pdf, ComponentLink5URL=https://datasheet.ciiva.com/16199/product-16199034.pdf, ComponentLink6Description=https://datasheet.ciiva.com/3777/3813grm155r71e103ka0123-3777115.pdf, ComponentLink6URL=https://datasheet.ciiva.com/3777/3813grm155r71e103ka0123-3777115.pdf, ComponentLink7Description=https://datasheet.ciiva.com/129/partnumbering-e-01-129741.pdf, ComponentLink7URL=https://datasheet.ciiva.com/129/partnumbering-e-01-129741.pdf, ComponentLink8Description=https://datasheet.ciiva.com/129/partnumbering-e-01-129742.pdf, ComponentLink8URL=https://datasheet.ciiva.com/129/partnumbering-e-01-129742.pdf, ComponentLink9Description=https://datasheet.ciiva.com/129/partnumbering-e-01-129743.pdf, ComponentLink9URL=https://datasheet.ciiva.com/129/partnumbering-e-01-129743.pdf, ComponentLink10Description=https://datasheet.ciiva.com/29199/454154-da-01-en-vs-kondensator-0402-29199817.pdf, ComponentLink10URL=https://datasheet.ciiva.com/29199/454154-da-01-en-vs-kondensator-0402-29199817.pdf, Depth=0.5mm, Height=0.5mm, Lead Free="Lead Free", Length=1mm, Material=Ceramic, Mount="Surface Mount", Number of Pins=2, Packaging="Tape and Reel", Pricing 1="1=0.1, 10=0.014, 100=0.0064, 500=0.00456, 1000=0.00358, 2500=0.00325, 5000=0.00299 (USD)", Radiation Hardening=No, REACH SVHC="No SVHC", Stock 1=4968292, Supplier 1=Digi-Key, Termination=SMD/SMT, Thickness=0.022inch, Voltage Rating=25V, Voltage Rating (DC)=25V, Width=0.5mm
C13: library part "0.015uF 16V 0402", "CAP CER 0.015UF 16V X7R 0402", Capacitance=15nF, Case/Package=0402, Case Code (Metric)=1005, Dielectric=X7R, Manufacturer=Murata, Manufacturer Part Number=GRM155R71C153KA01J, Max Operating Temperature=125°C, Min Operating Temperature=-55°C, Package Quantity=1, Supplier Part Number 1=490-6329-1-ND, Tolerance=10%, Voltage Rating=16V, Case Code (Imperial)=0402, ClassName=SMT, ComponentLink1Description=https://datasheet.ciiva.com/6271/partnumbering-e-01-6271147.pdf, ComponentLink1URL=https://datasheet.ciiva.com/6271/partnumbering-e-01-6271147.pdf, ComponentLink2Description=https://datasheet.ciiva.com/11619/product-11619501.pdf, ComponentLink2URL=https://datasheet.ciiva.com/11619/product-11619501.pdf, ComponentLink3Description=https://datasheet.ciiva.com/6271/partnumbering-e-01-6271151.pdf, ComponentLink3URL=https://datasheet.ciiva.com/6271/partnumbering-e-01-6271151.pdf, Depth=0.5mm, Height=0.5mm, Length=1mm, Mount="Surface Mount", Packaging="Tape and Reel", Pricing 1="1=0.1, 10=0.044, 100=0.0197, 500=0.01408, 1000=0.01107, 2500=0.01006, 5000=0.00926 (USD)", Radiation Hardening=No, Stock 1=43188, Supplier 1=Digi-Key, Termination=SMD/SMT, Thickness=0.022inch, Voltage Rating (DC)=16V, Width=0.02inch
D1 D7: "TVS DIODE 3V 17V ST0201", Breakdown Voltage=6V, Capacitance=0.5pF, Case/Package=0201, Case Code (Metric)=0603, Clamping Voltage=17V, Leakage Current=70nA, Manufacturer=STMicroelectronics, Max Operating Temperature=150°C, Max Surge Current=1.3A, Min Operating Temperature=-40°C, Package Quantity=1, Peak Pulse Current=1A, Peak Pulse Power=40W, Power Line Protection=No, Reverse Standoff Voltage=3V, Supplier Part Number 1=497-13414-1-ND, Test Current=1mA, Case Code (Imperial)=0201, ClassName=SMT, ComponentLink1Description="Manufacturer URL", ComponentLink1URL=http://www.onsemi.com/, ComponentLink2Description=Datasheet, ComponentLink2URL=http://www.onsemi.cn/pub_link/Collateral/ESD11B-D.PDF, ComponentLink3Description="Package Specification", ComponentLink3URL=http://www.onsemi.com/pub_link/Collateral/152AA.PDF, ComponentLink4Description=https://datasheet.ciiva.com/6577/esd11b-d-6577814.pdf?src-supplier=Digi-Key, ComponentLink4URL=https://datasheet.ciiva.com/6577/esd11b-d-6577814.pdf?src-supplier=Digi-Key, ComponentLink5Description=https://datasheet.ciiva.com/6577/esd11b-d-6577815.pdf?src-supplier=Digi-Key, ComponentLink5URL=https://datasheet.ciiva.com/6577/esd11b-d-6577815.pdf?src-supplier=Digi-Key, ComponentLink6Description=https://datasheet.ciiva.com/11193/esd11b-d-11193656.pdf?src-supplier=Avnet, ComponentLink6URL=https://datasheet.ciiva.com/11193/esd11b-d-11193656.pdf?src-supplier=Avnet, ComponentLink7Description=https://datasheet.ciiva.com/4510/esd11b-d-4510297.pdf?src-supplier=Mouser, ComponentLink7URL=https://datasheet.ciiva.com/4510/esd11b-d-4510297.pdf?src-supplier=Mouser, ComponentLink8Description=https://datasheet.ciiva.com/24017/dm00065800-24017847.pdf?src-supplier=Avnet, ComponentLink8URL=https://datasheet.ciiva.com/24017/dm00065800-24017847.pdf?src-supplier=Avnet, ComponentLink9Description=https://datasheet.ciiva.com/24017/dm00065800-24017847.pdf?src-supplier=Mouser, ComponentLink9URL=https://datasheet.ciiva.com/24017/dm00065800-24017847.pdf?src-supplier=Mouser, ComponentLink10Description=https://datasheet.ciiva.com/41443/001183999-da-01-en-tvs-diode-3v-1-esdaxlc6-1bu2-st-0201-stm-41443438.pdf?src-supplier=Conrad, ComponentLink10URL=https://datasheet.ciiva.com/41443/001183999-da-01-en-tvs-diode-3v-1-esdaxlc6-1bu2-st-0201-stm-41443438.pdf?src-supplier=Conrad, Composition=Zener, Depth=0.3mm, Direction=Bidirectional, Element Configuration=Single, ESD Protection=Yes, Height=0.33mm, Lead Free="Lead Free", Length=0.6mm, Manufacturer Part Number=ESDAXLC6-1BU2, Max Reverse Leakage Current=70nA, Min Breakdown Voltage=6V, Mount="Surface Mount", Number of Bidirectional Channels=1, Number of Channels=1, Number of Pins=2, Packaging="Tape and Reel", Polarity=Bidirectional, Pricing 1="1 = 0.42000, 10 = 0.31900, 100 = 0.19890, 500 = 0.13610, 1000 = 0.10469 (USD)", Radiation Hardening=No, RoHS=Yes, Stock 1=25159, Supplier 1=Digi-Key, Termination=SMD/SMT, Width=0.35mm
D2 D6: library part "Green 0603 LED", "LED GREEN CLEAR 0603 SMD", Case/Package=0603, Case Code (Metric)=1608, Colour=Green, Forward Current=20mA, Forward Voltage=2V, Lens Colour=Clear, Manufacturer=Dialight, Manufacturer Part Number=598-8070-107F, Max Operating Temperature=100°C, Min Operating Temperature=-30°C, Package Quantity=4000, Power Dissipation=60mW, Supplier Part Number 1=350-2035-1-ND, Case Code (Imperial)=0603, ClassName=SMT, ComponentLink1Description=https://datasheet.ciiva.com/4688/598-selectorguide-18902-4688880.pdf, ComponentLink1URL=https://datasheet.ciiva.com/4688/598-selectorguide-18902-4688880.pdf, ComponentLink2Description=https://datasheet.ciiva.com/11774/0900766b80ae2975-11774257.pdf, ComponentLink2URL=https://datasheet.ciiva.com/11774/0900766b80ae2975-11774257.pdf, ComponentLink3Description=https://datasheet.ciiva.com/1243/1484480-1243893.pdf, ComponentLink3URL=https://datasheet.ciiva.com/1243/1484480-1243893.pdf, ComponentLink4Description=https://datasheet.ciiva.com/2110/598-series-0603-pkg-2110165.pdf, ComponentLink4URL=https://datasheet.ciiva.com/2110/598-series-0603-pkg-2110165.pdf, ComponentLink5Description=https://datasheet.ciiva.com/1243/1484480-1243894.pdf, ComponentLink5URL=https://datasheet.ciiva.com/1243/1484480-1243894.pdf, ComponentLink6Description=https://datasheet.ciiva.com/2110/598-series-0603-pkg-2110166.pdf, ComponentLink6URL=https://datasheet.ciiva.com/2110/598-series-0603-pkg-2110166.pdf, ComponentLink7Description=https://datasheet.ciiva.com/2110/598-series-0603-pkg-2110167.pdf, ComponentLink7URL=https://datasheet.ciiva.com/2110/598-series-0603-pkg-2110167.pdf, ComponentLink8Description=https://datasheet.ciiva.com/14605/70081990-14605530.pdf, ComponentLink8URL=https://datasheet.ciiva.com/14605/70081990-14605530.pdf, ComponentLink9Description=https://datasheet.ciiva.com/15965/mdei5980603-15965419.pdf, ComponentLink9URL=https://datasheet.ciiva.com/15965/mdei5980603-15965419.pdf, ComponentLink10Description=https://datasheet.ciiva.com/30188/mdei5980603-30188139.pdf, ComponentLink10URL=https://datasheet.ciiva.com/30188/mdei5980603-30188139.pdf, ComponentLink11Description=https://datasheet.ciiva.com/15117/getdatasheetpartid-146438-15117836.pdf, ComponentLink11URL=https://datasheet.ciiva.com/15117/getdatasheetpartid-146438-15117836.pdf, ComponentLink12Description=https://datasheet.ciiva.com/22749/1484480-22749228.pdf, ComponentLink12URL=https://datasheet.ciiva.com/22749/1484480-22749228.pdf, ComponentLink13Description=https://datasheet.ciiva.com/16400/smt-selector-guide-16400463.pdf, ComponentLink13URL=https://datasheet.ciiva.com/16400/smt-selector-guide-16400463.pdf, Depth=0.8mm, Dominant Wavelength=568nm, Height=0.7mm, Illumination Colour=Green, Lead Free="Lead Free", Length=1.6mm, Lens Style=Clear,Diffused,Colorless,Rectangular, Luminous Intensity=20mcd, Mount="Surface Mount", Number of Elements=1, Number of LEDs=1, Number of Pins=2, Packaging="Tape and Reel", Pricing 1="1=0.45, 10=0.327, 25=0.2504, 100=0.1634, 250=0.1198, 500=0.1016, 1000=0.0835 (USD)", Radiation Hardening=No, REACH SVHC="No SVHC", Stock 1=147636, Supplier 1=Digi-Key, Test Current=20mA, Viewing Angle=140°, Wavelength=570nm, Width=0.8mm
D3: "DIODE GEN PURP 75V 150MA SOD523", Average Rectified Current=150mA, Capacitance=2pF, Forward Current=300mA, Forward Voltage=1.25V, Manufacturer=MCC, Max Operating Temperature=150°C, Max Repetitive Reverse Voltage (Vrrm)=100V, Max Reverse Leakage Current=1uA, Max Reverse Voltage (DC)=75V, Max Surge Current=2A, Min Operating Temperature=-65°C, Package Quantity=1, Power Dissipation=200mW, Supplier Part Number 1=1N4148XTPMSCT-ND, ClassName=SMT, ComponentLink1Description=https://datasheet.ciiva.com/4435/1n4148xsod-523-358-4435190.pdf?src-supplier=Mouser, ComponentLink1URL=https://datasheet.ciiva.com/4435/1n4148xsod-523-358-4435190.pdf?src-supplier=Mouser, ComponentLink2Description=https://datasheet.ciiva.com/911/1n4148xsod-523-911686.pdf?src-supplier=Digi-Key, ComponentLink2URL=https://datasheet.ciiva.com/911/1n4148xsod-523-911686.pdf?src-supplier=Digi-Key, ComponentLink3Description=https://datasheet.ciiva.com/911/1n4148xsod-523-911687.pdf?src-supplier=Digi-Key, ComponentLink3URL=https://datasheet.ciiva.com/911/1n4148xsod-523-911687.pdf?src-supplier=Digi-Key, ComponentLink4Description=https://datasheet.ciiva.com/911/1n4148xsod-523-911688.pdf?src-supplier=Digi-Key, ComponentLink4URL=https://datasheet.ciiva.com/911/1n4148xsod-523-911688.pdf?src-supplier=Digi-Key, ComponentLink5Description=https://datasheet.ciiva.com/16836/1n4148xsod-523-16836299.pdf?src-supplier=Future+Electronics, ComponentLink5URL=https://datasheet.ciiva.com/16836/1n4148xsod-523-16836299.pdf?src-supplier=Future+Electronics, Current Rating=150mA, Element Configuration=Single, Lead Free="Lead Free", Manufacturer Part Number=1N4148X-TP, Mount="Surface Mount", Number of Pins=2, Output Current=300mA, Packaging="Tape and Reel", Peak Non-Repetitive Surge Current=2A, Polarity=Standard, Pricing 1="1 = 0.14000, 10 = 0.12500, 100 = 0.08150, 500 = 0.03986, 1000 = 0.02718 (USD)", Radiation Hardening=No, Recovery Time=4ns, Reverse Recovery Time=4ns, RoHS=Yes, Stock 1=2150607, Supplier 1=Digi-Key, Voltage Rating (DC)=75V
D4: library part PMEG2020EPK,315, "DIODE SCHOTTKY 20V 2A 2DFN", Average Rectified Current=2A, Case/Package=SMD/SMT, Forward Voltage=395mV, Manufacturer="NXP Semiconductors", Max Forward Surge Current (Ifsm)=5A, Max Operating Temperature=150°C, Max Power Dissipation=1.565W, Max Repetitive Reverse Voltage (Vrrm)=20V, Min Operating Temperature=-55°C, Natural Thermal Resistance=20°C/W, Package Quantity=8000, Peak Reverse Current=70uA, Supplier Part Number 1=1727-1338-1-ND, ClassName=SMT, ComponentLink1Description=https://datasheet.ciiva.com/29592/pmeg2020epk-29592900.pdf, ComponentLink1URL=https://datasheet.ciiva.com/29592/pmeg2020epk-29592900.pdf, ComponentLink2Description=https://datasheet.ciiva.com/29592/pmeg2020epk-29592901.pdf, ComponentLink2URL=https://datasheet.ciiva.com/29592/pmeg2020epk-29592901.pdf, ComponentLink3Description=https://datasheet.ciiva.com/24111/pmeg2020epk-268880-24111063.pdf, ComponentLink3URL=https://datasheet.ciiva.com/24111/pmeg2020epk-268880-24111063.pdf, ComponentLink4Description=https://datasheet.ciiva.com/25648/pmeg2020epk-25648600.pdf, ComponentLink4URL=https://datasheet.ciiva.com/25648/pmeg2020epk-25648600.pdf, Element Configuration=Single, Forward Current=2A, Manufacturer Part Number=PMEG2020EPK,315, Mount="Surface Mount", Number of Pins=2, Packaging="Tape and Reel", Peak Non-Repetitive Surge Current=5A, Pricing 1="1=0.51, 10=0.387, 100=0.2411, 500=0.165, 1000=0.1269 (USD)", Radiation Hardening=No, Reverse Recovery Time=5ns, Reverse Voltage (DC)=20V, Stock 1=146420, Supplier 1=Digi-Key
D5: library part "Blue 0603 LED", "LED BLUE CLEAR 0603 SMD", Case/Package=0603, Case Code (Metric)=1608, Colour=Blue, Forward Current=20mA, Forward Voltage=3.2V, Lens Colour=Clear,Colorless, Manufacturer=Dialight, Manufacturer Part Number=598-8091-107F, Max Operating Temperature=100°C, Min Operating Temperature=-30°C, Package Quantity=4000, Power Dissipation=70mW, Supplier Part Number 1=350-2037-1-ND, Case Code (Imperial)=0603, ClassName=SMT, ComponentLink1Description=https://datasheet.ciiva.com/15118/getdatasheetpartid-194139-15118048.pdf, ComponentLink1URL=https://datasheet.ciiva.com/15118/getdatasheetpartid-194139-15118048.pdf, ComponentLink2Description=https://datasheet.ciiva.com/2111/598-series-0603-pkg-2111556.pdf, ComponentLink2URL=https://datasheet.ciiva.com/2111/598-series-0603-pkg-2111556.pdf, ComponentLink3Description=https://datasheet.ciiva.com/2111/598-series-0603-pkg-2111557.pdf, ComponentLink3URL=https://datasheet.ciiva.com/2111/598-series-0603-pkg-2111557.pdf, ComponentLink4Description=https://datasheet.ciiva.com/15965/mdei5980603-15965445.pdf, ComponentLink4URL=https://datasheet.ciiva.com/15965/mdei5980603-15965445.pdf, ComponentLink5Description=https://datasheet.ciiva.com/30240/mdei5980603-30240533.pdf, ComponentLink5URL=https://datasheet.ciiva.com/30240/mdei5980603-30240533.pdf, ComponentLink6Description=https://datasheet.ciiva.com/2111/598-series-0603-pkg-2111558.pdf, ComponentLink6URL=https://datasheet.ciiva.com/2111/598-series-0603-pkg-2111558.pdf, ComponentLink7Description=https://datasheet.ciiva.com/7970/25658-7970182.pdf, ComponentLink7URL=https://datasheet.ciiva.com/7970/25658-7970182.pdf, ComponentLink8Description=https://datasheet.ciiva.com/14603/70081992-14603963.pdf, ComponentLink8URL=https://datasheet.ciiva.com/14603/70081992-14603963.pdf, ComponentLink9Description=https://datasheet.ciiva.com/16400/smt-selector-guide-16400478.pdf, ComponentLink9URL=https://datasheet.ciiva.com/16400/smt-selector-guide-16400478.pdf, Depth=0.8mm, Dominant Wavelength=470nm, Height=0.7mm, Illumination Colour=Blue, Lead Free="Lead Free", Length=1.6mm, Lens Style=Clear,Diffused,Colorless,Rectangular, Lens Transparency=Clear, Luminous Intensity=140mcd, Mount="Surface Mount", Number of Elements=1, Number of LEDs=1, Number of Pins=2, Packaging="Tape and Reel", Pricing 1="1=0.75, 10=0.583, 25=0.4864, 100=0.4189, 250=0.374, 500=0.3216, 1000=0.2483 (USD)", Radiation Hardening=No, REACH SVHC="No SVHC", Stock 1=42042, Supplier 1=Digi-Key, Test Current=20mA, Viewing Angle=140°, Wavelength=475nm, Width=0.8mm
D8: "TVS DIODE 5V 11.6V 1610", Case/Package=1610, Clamping Voltage=11.6V, Manufacturer=STMicroelectronics, Max Breakdown Voltage=7.2V, Max Operating Temperature=150°C, Min Breakdown Voltage=6.4V, Min Operating Temperature=-55°C, Peak Pulse Current=60A, Peak Pulse Power=700W, Power Line Protection=No, Reverse Standoff Voltage=5V, Supplier Part Number 1=497-16253-1-ND, ClassName=SMT, ComponentLink1Description=http://www.farnell.com/datasheets/2041290.pdf?src-supplier=Farnell, ComponentLink1URL=http://www.farnell.com/datasheets/2041290.pdf?src-supplier=Farnell, ComponentLink2Description=http://www.st.com/content/ccc/resource/technical/document/datasheet/44/e9/26/44/42/ee/4f/e5/DM00139972.pdf/files/DM00139972.pdf/jcr:content/translations/en.DM00139972.pdf?src-supplier=Digi-Key, ComponentLink2URL=http://www.st.com/content/ccc/resource/technical/document/datasheet/44/e9/26/44/42/ee/4f/e5/DM00139972.pdf/files/DM00139972.pdf/jcr:content/translations/en.DM00139972.pdf?src-supplier=Digi-Key, ComponentLink3Description=http://www.farnell.com/datasheets/2041290.pdf?src-supplier=Element14, ComponentLink3URL=http://www.farnell.com/datasheets/2041290.pdf?src-supplier=Element14, Composition=Zener, Manufacturer Part Number=ESDA7P60-1U1M, Mount="Surface Mount", Number of Pins=2, Number of Unidirectional Channels=1, Packaging="Cut Tape", Polarity=Unidirectional, Pricing 1="1 = 0.47000, 10 = 0.38100, 100 = 0.25960, 500 = 0.19468, 1000 = 0.14600 (USD)", REACH SVHC="No SVHC", RoHS=Yes, Stock 1=12135, Supplier 1=Digi-Key
J1: library part "USB-C Vertical", "CONN RCPT USB3.1 TYPEC 24POS SMD", Manufacturer="Amphenol FCI", Supplier Part Number 1=609-5380-1-ND, ClassName="PTH,Sensitive Exception", ComponentLink1Description=http://www.amphenol-icc.com/media/wysiwyg/files/drawing/10132328.pdf?src-supplier=Digi-Key, ComponentLink1URL=http://www.amphenol-icc.com/media/wysiwyg/files/drawing/10132328.pdf?src-supplier=Digi-Key, Manufacturer Part Number=10132328-10011LF, Pricing 1="1 = 2.67000, 10 = 2.41900, 25 = 2.27120, 50 = 2.17240, 100 = 2.07370 (USD)", RoHS=No, Stock 1=6832, Supplier 1=Digi-Key
J2: library part "Tag Connect 6-Pin SWD", "TAG CONNECT 6PIN SWD", ClassName="SMT,Sensitive Exception"
J3: library part "JST ZH 2-Pin PTH Vertical", "CONN HEADER ZH TOP 2POS 1.5MM", Color=Natural, Contact Resistance=30mR, Current Rating=1A, Flammability Rating="UL94 V-0", Housing Color=Beige, Insulation Resistance=500MR, Manufacturer=JST, Max Operating Temperature=85°C, Max Voltage Rating (AC)=50V, Min Operating Temperature=-25°C, Supplier Part Number 1=455-1657-ND, Body Plating=Tin, ClassName=PTH, ComponentLink1Description=https://datasheet.ciiva.com/26894/getdatasheetpartid-643133-26894438.pdf?src-supplier=Verical, ComponentLink1URL=https://datasheet.ciiva.com/26894/getdatasheetpartid-643133-26894438.pdf?src-supplier=Verical, ComponentLink2Description=https://datasheet.ciiva.com/11752/0900766b8082f580-11752167.pdf?src-supplier=RSComponents, ComponentLink2URL=https://datasheet.ciiva.com/11752/0900766b8082f580-11752167.pdf?src-supplier=RSComponents, ComponentLink3Description=https://datasheet.ciiva.com/25616/0900766b81147f94-25616906.pdf?src-supplier=RSComponents, ComponentLink3URL=https://datasheet.ciiva.com/25616/0900766b81147f94-25616906.pdf?src-supplier=RSComponents, ComponentLink4Description=https://datasheet.ciiva.com/8052/80551-8052026.pdf?src-supplier=Element14, ComponentLink4URL=https://datasheet.ciiva.com/8052/80551-8052026.pdf?src-supplier=Element14, ComponentLink5Description=https://datasheet.ciiva.com/712/ezh-712443.pdf?src-supplier=Digi-Key, ComponentLink5URL=https://datasheet.ciiva.com/712/ezh-712443.pdf?src-supplier=Digi-Key, Connector Type="Male Pin", Contact Material=Brass, Contact Mating Length=0.094inch, Contact Plating=Tin, Depth=3.5mm, Fastening Type=Detent, Gender=Male, Housing Material=Polyamide, Lead Free="Lead Free", Lead Pitch=1.5mm, Length=4.5mm, Manufacturer Part Number=B2B-ZR(LF)(SN), Material=Nylon, Max Current Rating=1A, Mount="Through Hole", Number of Contacts=2, Number of Positions=2, Number of Rows=1, Orientation=Straight, Packaging=Bulk, Panel Thickness=3.5mm, Pitch=1.5mm, Pricing 1="1 = 0.17000, 10 = 0.16200, 100 = 0.09990, 500 = 0.08270, 1000 = 0.07237, 5000 = 0.06203, 10000 = 0.06031 (USD)", REACH SVHC="No SVHC", RoHS=Yes, Stock 1=123534, Supplier 1=Digi-Key, Termination=Solder, Voltage Rating=50V, Voltage Rating (AC)=50V, Voltage Rating (DC)=50V
J4: library part "4-Pin 2x2 0.05in Header", "CONN HEADER VERT 4POS 1.27MM", Manufacturer=Sullins, Package Quantity=1, Supplier Part Number 1=S9015E-02-ND, ClassName=PTH, ComponentLink1Description=https://datasheet.ciiva.com/726/grpb-2vwvn-rc10954-c-726662.pdf?src-supplier=Digi-Key, ComponentLink1URL=https://datasheet.ciiva.com/726/grpb-2vwvn-rc10954-c-726662.pdf?src-supplier=Digi-Key, Connector Type="Male Pin", Contact Mating Length=0.118inch, Contact Plating=Gold, Manufacturer Part Number=GRPB022VWVN-RC, Mount="Through Hole", Number of Positions=4, Number of Rows=2, Packaging=Bulk, Pitch=0.05inch, Pricing 1="1 = 0.37000, 10 = 0.35000, 100 = 0.24480, 500 = 0.20980, 1000 = 0.17483, 5000 = 0.14985, 10000 = 0.14430 (USD)", RoHS=Yes, Row Spacing=0.05inch, Stock 1=1339, Supplier 1=Digi-Key, Termination=Solder
L1: "FERRITE BEAD 600 OHM 0402 1LN", Case/Package=0402, Case Code (Metric)=1005, Current Rating=900mA, DC Resistance (DCR)=230mR, Manufacturer=Murata, Max Operating Temperature=125°C, Min Operating Temperature=-55°C, Package Quantity=10000, Supplier Part Number 1=490-9657-1-ND, Test Frequency=100MHz, Tolerance=25%, Case Code (Imperial)=0402, ClassName=SMT, ComponentLink1Description=https://datasheet.ciiva.com/41860/l0110e-41860698.pdf, ComponentLink1URL=https://datasheet.ciiva.com/41860/l0110e-41860698.pdf, ComponentLink2Description=https://datasheet.ciiva.com/41449/001172217-da-01-en-drossel-0402-600r-1-0x0-5mm-10000st-41449505.pdf, ComponentLink2URL=https://datasheet.ciiva.com/41449/001172217-da-01-en-drossel-0402-600r-1-0x0-5mm-10000st-41449505.pdf, Height=0.5mm, Impedance=600R, Lead Free="Lead Free", Length=1mm, Manufacturer Part Number=BLM15PX601SN1D, Material=Steel, Max Current Rating=900mA, Max DC Current=900mA, Number of Circuits=1, Number of Lines=1, Number of Pins=2, Packaging="Tape and Reel", Pricing 1="1=0.15, 10=0.123, 25=0.0956, 50=0.0792, 100=0.0682, 250=0.0546, 500=0.0491, 1000=0.0409, 5000=0.0382 (USD)", Stock 1=156023, Supplier 1=Digi-Key, Termination=SMD/SMT, Width=0.5mm
Q1: "MOSFET P-CH 20V 770MA 3DFN", Case/Package=DFN, Continuous Drain Current (ID)=1.17A, Drain to Source Breakdown Voltage=-20V, Drain to Source Resistance=960mR, Drain to Source Voltage (Vdss)=20V, Gate to Source Voltage (Vgs)=8V, Input Capacitance=80pF, Manufacturer=Diodes, Max Operating Temperature=150°C, Max Power Dissipation=990mW, Min Operating Temperature=-55°C, Package Quantity=1, Supplier Part Number 1=DMP21D0UFB4-7BDICT-ND, ClassName=SMT, ComponentLink1Description=https://datasheet.ciiva.com/6369/dmp21d0ufb4-6369012.pdf, ComponentLink1URL=https://datasheet.ciiva.com/6369/dmp21d0ufb4-6369012.pdf, ComponentLink2Description=https://datasheet.ciiva.com/6369/dmp21d0ufb4-6369014.pdf, ComponentLink2URL=https://datasheet.ciiva.com/6369/dmp21d0ufb4-6369014.pdf, ComponentLink3Description=https://datasheet.ciiva.com/6369/dmp21d0ufb4-6369015.pdf, ComponentLink3URL=https://datasheet.ciiva.com/6369/dmp21d0ufb4-6369015.pdf, ComponentLink4Description=https://datasheet.ciiva.com/30023/dmp21d0ufb4-30023815.pdf, ComponentLink4URL=https://datasheet.ciiva.com/30023/dmp21d0ufb4-30023815.pdf, ComponentLink5Description=https://datasheet.ciiva.com/30479/0900766b8115c367-30479913.pdf, ComponentLink5URL=https://datasheet.ciiva.com/30479/0900766b8115c367-30479913.pdf, ComponentLink6Description=https://datasheet.ciiva.com/13051/dmp21d0ufb4-13051690.pdf, ComponentLink6URL=https://datasheet.ciiva.com/13051/dmp21d0ufb4-13051690.pdf, Contact Plating=Gold, Element Configuration=Single, Fall Time=18.5ns, Height=0.35mm, Lead Free="Lead Free", Length=1.05mm, Manufacturer Part Number=DMP21D0UFB4-7B, Mount="Surface Mount", Number of Channels=1, Number of Elements=1, Number of Pins=3, Packaging="Tape and Reel", Power Dissipation=990mW, Pricing 1="1=0.4, 10=0.303, 100=0.1886, 500=0.129, 1000=0.0992 (USD)", Radiation Hardening=No, Rds On Max=495mR, REACH SVHC="No SVHC", Rise Time=8ns, Stock 1=167177, Supplier 1=Digi-Key, Turn-Off Delay Time=31.7ns, Turn-On Delay Time=7.1ns, Width=0.65mm
R1 R2: library part "5.1k 0402", "RES SMD 5.1K OHM 1% 1/16W 0402", Case/Package=0402, Case Code (Metric)=1005, Manufacturer=Yageo, Manufacturer Part Number=RC0402FR-075K1L, Max Operating Temperature=155°C, Max Power Dissipation=63mW, Min Operating Temperature=-55°C, Package Quantity=1, Resistance=5.1kR, Supplier Part Number 1=311-5.10KLRCT-ND, Temperature Coefficient=100ppm/°C, Tolerance=1%, Voltage Rating=50V, Case Code (Imperial)=0402, ClassName=SMT, ComponentLink1Description=https://datasheet.ciiva.com/15189/getdatasheetpartid-323636-15189493.pdf?src-supplier=Verical, ComponentLink1URL=https://datasheet.ciiva.com/15189/getdatasheetpartid-323636-15189493.pdf?src-supplier=Verical, ComponentLink2Description=https://datasheet.ciiva.com/2453/pyu-r-int-thick-7-2453400.pdf?src-supplier=Digi-Key, ComponentLink2URL=https://datasheet.ciiva.com/2453/pyu-r-int-thick-7-2453400.pdf?src-supplier=Digi-Key, ComponentLink3Description=https://datasheet.ciiva.com/46394/1018594-46394936.pdf?src-supplier=Element14, ComponentLink3URL=https://datasheet.ciiva.com/46394/1018594-46394936.pdf?src-supplier=Element14, ComponentLink4Description=https://datasheet.ciiva.com/2453/pyu-r-int-thick-7-2453401.pdf?src-supplier=Digi-Key, ComponentLink4URL=https://datasheet.ciiva.com/2453/pyu-r-int-thick-7-2453401.pdf?src-supplier=Digi-Key, ComponentLink5Description=https://datasheet.ciiva.com/2453/pyu-r-int-thick-7-2453402.pdf?src-supplier=Digi-Key, ComponentLink5URL=https://datasheet.ciiva.com/2453/pyu-r-int-thick-7-2453402.pdf?src-supplier=Digi-Key, ComponentLink6Description=https://datasheet.ciiva.com/16744/pyu-rc0402-51-rohs-l-6-r-16744283.pdf?src-supplier=Future+Electronics, ComponentLink6URL=https://datasheet.ciiva.com/16744/pyu-rc0402-51-rohs-l-6-r-16744283.pdf?src-supplier=Future+Electronics, ComponentLink7Description=https://datasheet.ciiva.com/12558/pyu-rc0402-51-rohs-l-6-r-8721-12558460.pdf?src-supplier=Mouser, ComponentLink7URL=https://datasheet.ciiva.com/12558/pyu-rc0402-51-rohs-l-6-r-8721-12558460.pdf?src-supplier=Mouser, ComponentLink8Description=https://datasheet.ciiva.com/7983/1018594-7983519.pdf?src-supplier=Element14, ComponentLink8URL=https://datasheet.ciiva.com/7983/1018594-7983519.pdf?src-supplier=Element14, Composition="Thick Film", Depth=0.5mm, Features="Moisture Resistant", Height=0.016inch, Lead Free="Lead Free", Length=1mm, Military Standard=Not, Number of Terminations=2, Packaging="Tape and Reel", Power Rating=63mW, Pricing 1="1 = 0.10000, 10 = 0.01600, 100 = 0.00670, 1000 = 0.00301, 2500 = 0.00261, 5000 = 0.00215 (USD)", REACH SVHC=Unknown, RoHS=Yes, Stock 1=3990797, Supplier 1=Digi-Key, Termination=SMD/SMT, Voltage Rating (DC)=50V, Width=0.02inch, Working Voltage=50V